# Altium PCB new示波器pcb.PcbDoc
Units mil, origin at the board's own origin, x right, y up, seen from the top; angles counter-clockwise.
Board outline 6795 x 3885 mil, 2 copper layers (Top Layer, Bottom Layer); 168 components, 155 nets, 695 pads, 49 vias.
Unrouted connection lines stored in the file: 188.
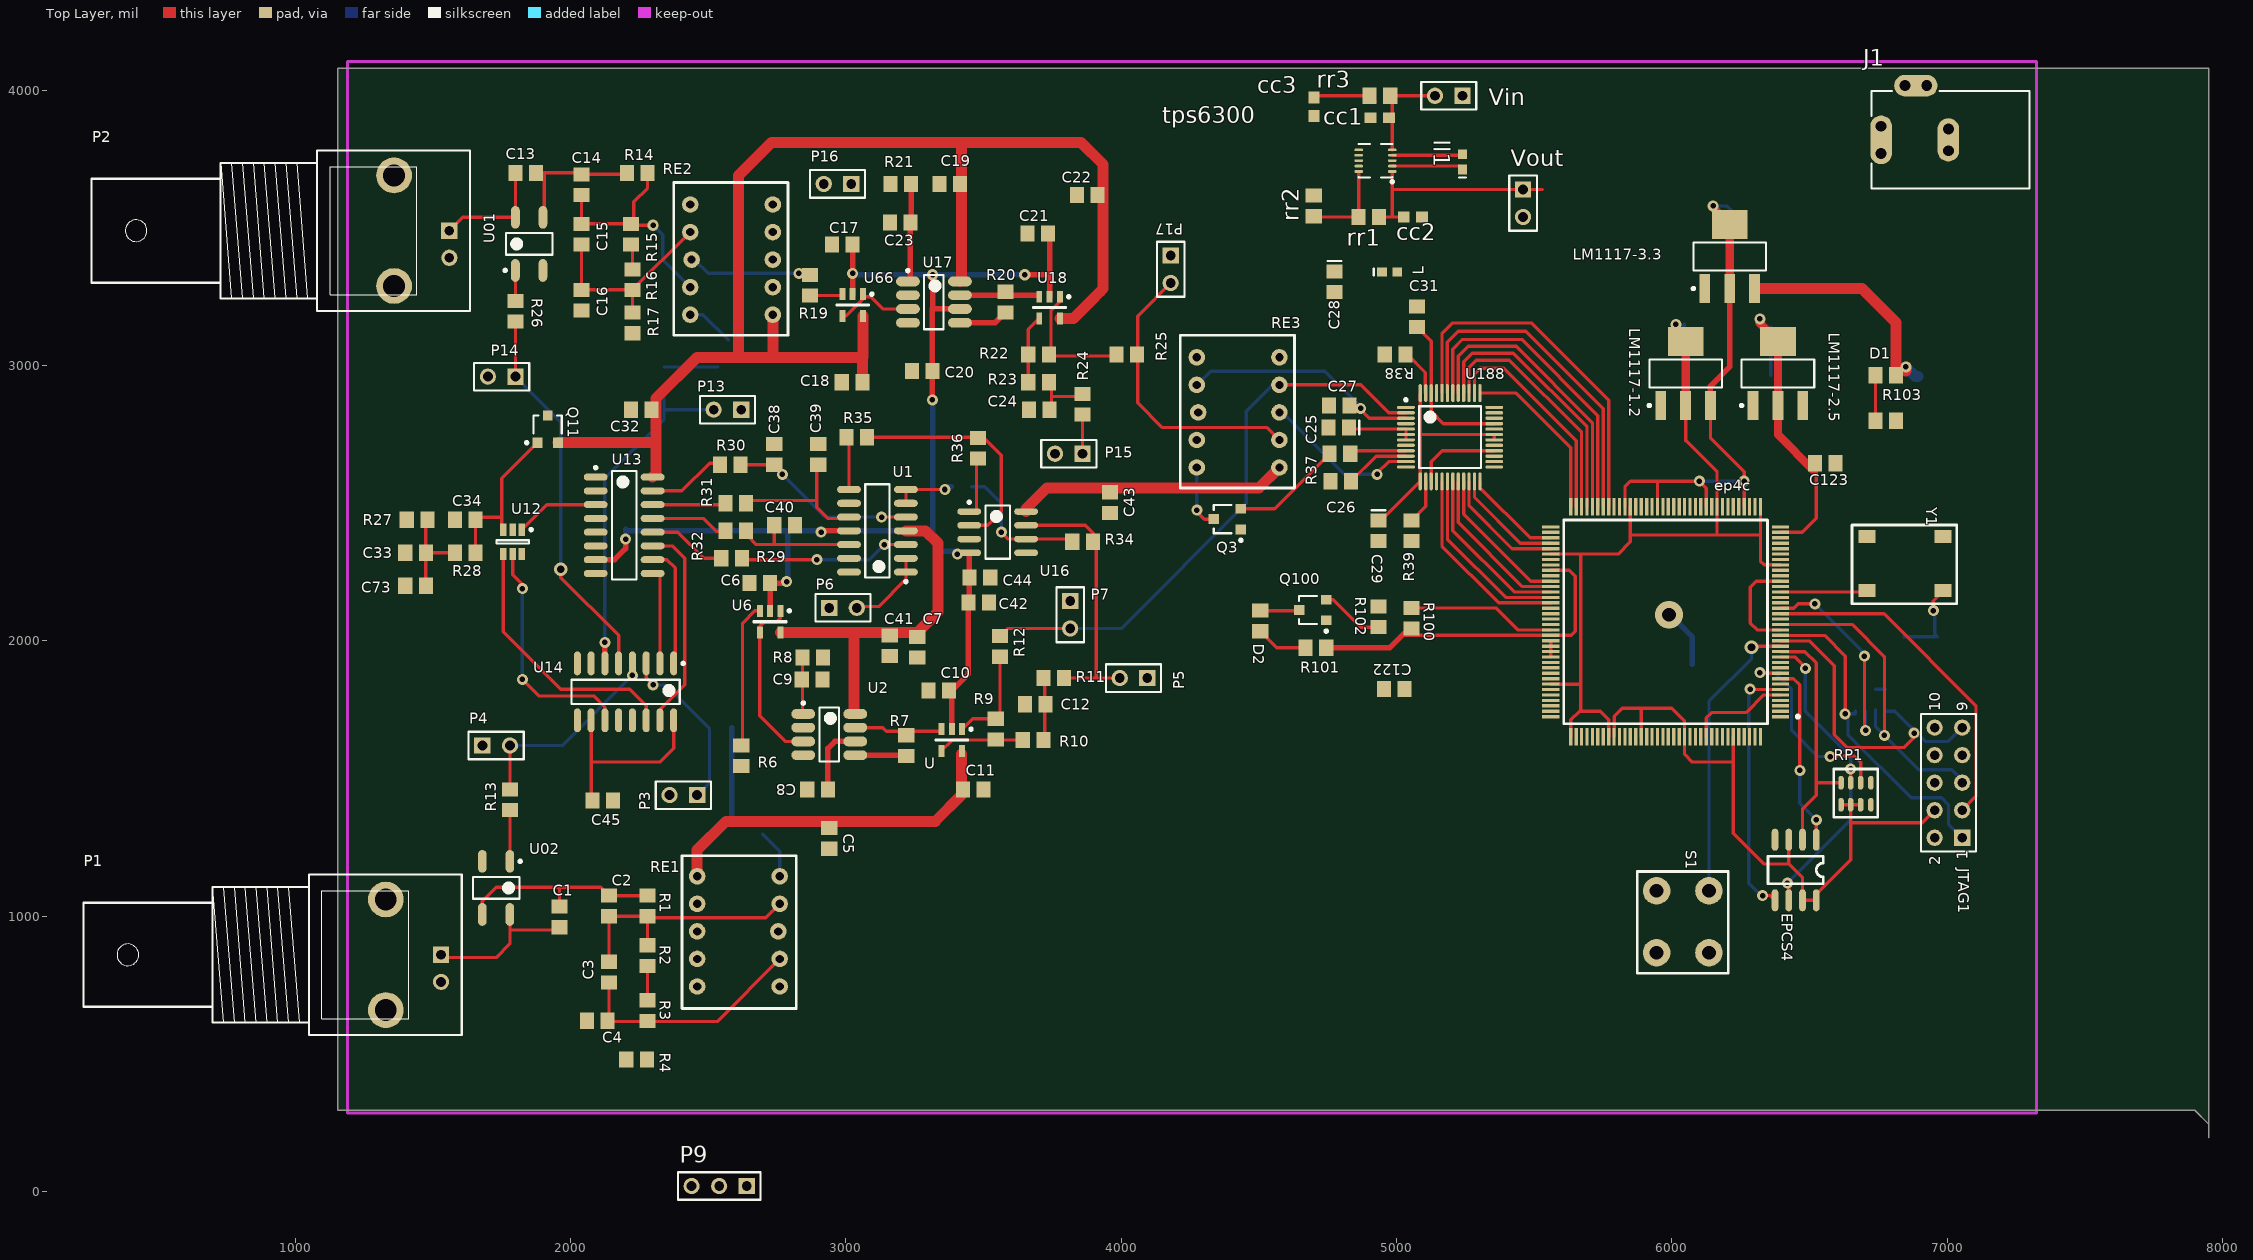
[diagram p0: Top Layer view]
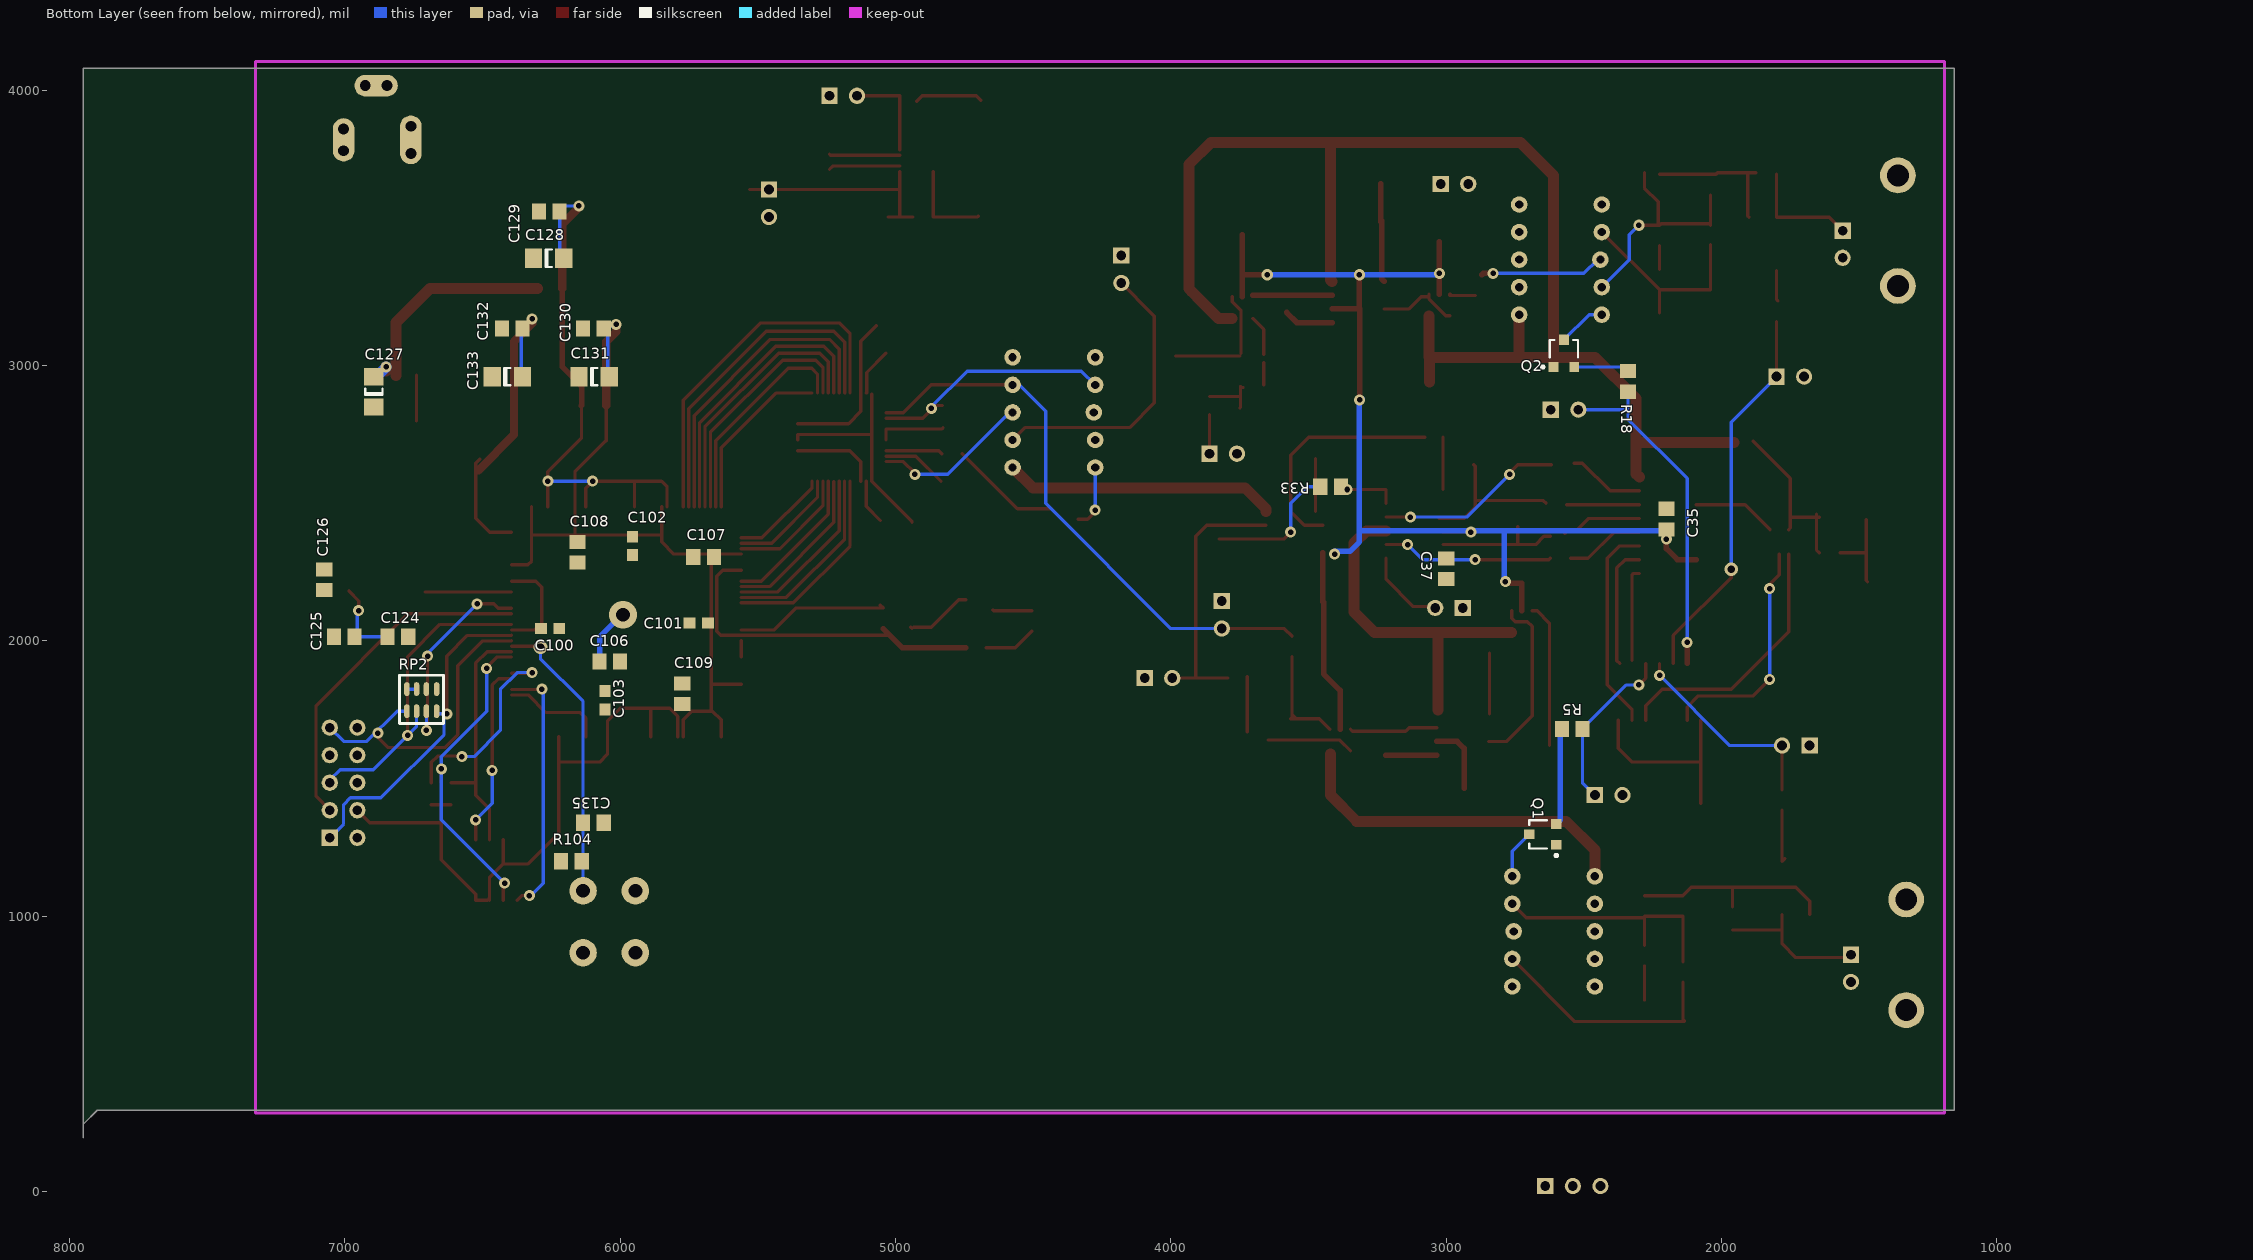
[diagram p1: Bottom Layer view, seen from below]

## Layer stack, top to bottom
Top Layer: signal copper 1.4
Dielectric: dielectric 12.6, FR-4, Dk 4.8
Bottom Layer: signal copper 1.4

## Board outline
1155,4080 7950,4080 7950,195 7950,245 7900,295 2380,295 1155,295 1155,4080

## Design rules (kind name [scope] priority, off if disabled: settings)
Clearance [All] p1: gap=1
HoleToHoleClearance [All] p1: gap=1 allowstackedmicrovias=TRUE
MinimumSolderMaskSliver [All] p1: minsoldermaskwidth=1
PolygonConnect [All] p1: connectstyle=Relief reliefconductorwidth=10 reliefentries=4 polygonreliefangle="90 Angle"
RoutingVias [All] p1: holewidth=28 width=50 viastyle="Through Hole" minholewidth=20 minwidth=40 maxholewidth=28 maxwidth=50
SilkToSilkClearance [All] p1: silktosilkclearance=1
SilkscreenOverComponentPads [All] p1: minsilkscreentomaskgap=1
SolderMaskExpansion [All] p1: expansion=4
TestPointUsage [All] p1: valid=0 allowmultiple=FALSE
Testpoint [All] p1: side=15 testpointundercomponent=TRUE minsize=40 maxsize=100 preferedsize=60 minholesize=0 maxholesize=40 preferedholesize=32 testpointgrid=1 style=1021 order=0123456789
Width [All] p1: maxlimit=100 minlimit=10 preferedwidth=10
20 further rules are at their usual default settings.

## Classes and differential pairs
component class 示波器原理图2: C13 C14 C15 C16 C17 C18 C19 C20 C21 C22 C23 C24 P2 P13 P14 P15 P16 P17 Q2 R14 R15 R16 R17 R18 R19 R20 R21 R22 R23 R24 R25 R26 RE2 U01 U17 U18 U66
component class 示波器原理图: C1 C2 C3 C4 C5 C6 C7 C8 C9 C10 C11 C12 P1 P3 P4 P5 P6 P7 P9 Q1 R1 R2 R3 R4 R5 R6 R7 R8 R9 R10 R11 R12 R13 RE1 RE4 U U02 U2 U6 U9 U20 U21
component class 示波器原理图3: C32 C33 C34 C35 C36 C37 C38 C39 C40 C41 C42 C43 C44 C45 C73 Q11 R27 R28 R29 R30 R31 R32 R33 R34 R35 R36 U1 U12 U13 U14 U16 U?
component class 示波器原理图5: C25 C26 C27 C28 C29 C30 C31 L Q3 R37 R38 R39 RE3 u1 U188
component class 示波器原理图7: C124 C125 C126 C127 C128 C129 C130 C131 C132 C133 C135 D1 D2 ep4c EPCS4 J1 JTAG1 LM1117-1.2 LM1117-2.5 LM1117-3.3 Q100 R100 R101 R102 R103 R104 RP1 RP2 S1 Y1
component class 示波器原理图6: C100 C101 C102 C103 C106 C107 C108 C109 C120 C121 C122 C123
component class TPS63000: cc1 cc2 cc3 ll1 rr1 rr2 rr3 tps6300 Vin Vout

## Components (designator, comment, footprint, x,y, rotation, side; value= is the part's Value field where it differs from the comment)
C1 "" PCBComponent_1#1 1960,960 r90 top
C2 "" PCBComponent_1#1 2140,1000 r90 top
C3 "" PCBComponent_1#1 2140,760 r90 top
C4 "" PCBComponent_1#1 2060,620 r0 top
C5 "" PCBComponent_1#1 2940,1320 r270 top
C6 "104" PCBComponent_1#1 2725,2210 r180 top
C7 "" PCBComponent_1#1 3260,1940 r90 top
C8 "" PCBComponent_1#1 2860,1460 r0 top
C9 "" PCBComponent_1#1 2840,1860 r0 top
C10 "" PCBComponent_1#1 3300,1820 r0 top
C11 "" PCBComponent_1#1 3500,1460 r180 top
C12 "" PCBComponent_1#1 3725,1770 r180 top
C13 "" PCBComponent_1#1 1800,3700 r0 top
C14 "" PCBComponent_1#1 2040,3620 r90 top
C15 "" PCBComponent_1#1 2040,3440 r90 top
C16 "" PCBComponent_1#1 2040,3200 r90 top
C17 "104" PCBComponent_1#1 3025,3440 r180 top
C18 "" PCBComponent_1#1 3060,2940 r180 top
C19 "" PCBComponent_1#1 3340,3660 r0 top
C20 "" PCBComponent_1#1 3240,2980 r0 top
C21 "" PCBComponent_1#1 3660,3480 r0 top
C22 "" PCBComponent_1#1 3840,3620 r0 top
C23 "" PCBComponent_1#1 3235,3520 r180 top
C24 "" PCBComponent_1#1 3740,2840 r180 top
C25 "" C0805 4790,2775 r180 top
C26 "" PCBComponent_1#1 4835,2580 r180 top
C27 "" PCBComponent_1#1 4830,2855 r180 top
C28 "" C0805 4775,3305 r270 top
C29 "" C0805 4935,2400 r270 top
C31 "" PCBComponent_1#1 5075,3140 r90 top
C32 "" PCBComponent_1#1 2220,2840 r0 top
C33 "" PCBComponent_1#1 1400,2320 r0 top
C34 "" PCBComponent_1#1 1580,2440 r0 top
C35 "" PCBComponent_1#1 2200,2480 r270 bottom
C37 "" PCBComponent_1#1 3000,2300 r270 bottom
C38 "" PCBComponent_1#1 2740,2640 r90 top
C39 "" PCBComponent_1#1 2900,2640 r90 top
C40 "" PCBComponent_1#1 2740,2420 r0 top
C41 "" PCBComponent_1#1 3160,2020 r270 top
C42 "" PCBComponent_1#1 3520,2140 r180 top
C43 "" PCBComponent_1#1 3960,2540 r270 top
C44 "" PCBComponent_1#1 3450,2230 r0 top
C45 "" PCBComponent_1#1 2080,1420 r0 top
C73 "" PCBComponent_1#1 1400,2200 r0 top
C100 "" PCBComponent_1#2 6215,2045 r0 bottom
C101 "" PCBComponent_1#2 5755,2065 r180 bottom
C102 "" PCBComponent_1#2 5955,2305 r90 bottom
C103 "" PCBComponent_1#2 6055,1825 r270 bottom
C106 "" PCBComponent_1#1 6075,1925 r180 bottom
C107 "" PCBComponent_1#1 5735,2305 r180 bottom
C108 "" PCBComponent_1#1 6155,2285 r90 bottom
C109 "" PCBComponent_1#1 5775,1845 r270 bottom
C122 "" PCBComponent_1#1 4955,1825 r0 top
C123 "" PCBComponent_1#1 6595,2645 r180 top
C124 "" PCBComponent_1#1 6845,2015 r180 bottom
C125 "" PCBComponent_1#1 6965,2015 r0 bottom
C126 "" PCBComponent_1#1 7075,2185 r90 bottom
C127 "" C1206 6895,2905 r90 bottom
C128 "" C1206 6260,3390 r180 bottom
C129 "0.1u" PCBComponent_1#1 6220,3560 r0 bottom
C130 "0.1u" PCBComponent_1#1 6060,3135 r0 bottom
C131 "" C1206 6095,2960 r180 bottom
C132 "0.1u" PCBComponent_1#1 6355,3135 r0 bottom
C133 "" C1206 6410,2960 r180 bottom
C135 "" PCBComponent_1#1 6060,1340 r0 bottom
cc1 "" 1608[0603] 4940,3900 r180 top
cc2 "" 1608[0603] 5060,3540 r0 top
cc3 "" 1608[0603] 4700,3940 r270 top
D1 "LED0" PCBComponent_1#1 6815,2965 r180 top
D2 "LED0" PCBComponent_1#1 4505,2035 r90 top
ep4c "Component_1" PCBComponent_1#3 6395,1725 r180 top
EPCS4 "" PCBComponent_1#4 6515,1165 r270 top
J1 "PWR" KLD-0202 7300,3820 r180 top
JTAG1 "" HDR2X5 7055,1285 r90 top
L "" L0603 4975,3340 r0 top
ll1 "" L0603 5240,3740 r90 top
LM1117-1.2 "" PCBComponent_1#5 5960,2855 r90 top
LM1117-2.5 "" PCBComponent_1#5 6295,2855 r90 top
LM1117-3.3 "" PCBComponent_1#5 6120,3280 r90 top
P1 "BNC" "BNC_RA CON" 1530,860 r0 top
P2 "BNC" "BNC_RA CON" 1560,3490 r0 top
P3 "Header 2" HDR1X2 2460,1440 r180 top
P4 "Header 2" HDR1X2 1680,1620 r0 top
P5 "Header 2" HDR1X2 4095,1865 r180 top
P6 "Header 2" HDR1X2 2940,2120 r0 top
P7 "Header 2" HDR1X2 3815,2145 r270 top
P9 "Header 3" HDR1X3 2640,20 r180 top
P13 "Header 2" HDR1X2 2620,2840 r180 top
P14 "Header 2" HDR1X2 1800,2960 r180 top
P15 "Header 2" HDR1X2 3860,2680 r180 top
P16 "Header 2" HDR1X2 3020,3660 r180 top
P17 "Header 2" HDR1X2 4180,3400 r270 top
Q1 "8050" PCBComponent_1#6 2600,1260 r90 bottom
Q2 "8050" PCBComponent_1#6 2610,2995 r180 bottom
Q3 "80501" PCBComponent_1#6 4435,2405 r90 top
Q11 "80501" PCBComponent_1#6 1880,2720 r0 top
Q100 "9013" PCBComponent_1#6 4745,2075 r90 top
R1 "" PCBComponent_1#1 2280,1000 r90 top
R2 "" PCBComponent_1#1 2280,820 r90 top
R3 "" PCBComponent_1#1 2280,620 r90 top
R4 "" 2012[0805] 2240,480 r0 top
R5 "" PCBComponent_1#1 2580,1680 r180 bottom
R6 "" PCBComponent_1#1 2620,1620 r270 top
R7 "" 2012[0805] 3220,1620 r270 top
R8 "" 2012[0805] 2880,1940 r180 top
R9 "" 2012[0805] 3545,1680 r270 top
R10 "" 2012[0805] 3680,1640 r180 top
R11 "" 2012[0805] 3755,1865 r180 top
R12 "" 2012[0805] 3560,1980 r270 top
R13 "" PCBComponent_1#1 1780,1460 r270 top
R14 "" PCBComponent_1#1 2280,3700 r180 top
R15 "" PCBComponent_1#1 2220,3440 r90 top
R16 "" PCBComponent_1#1 2225,3275 r90 top
R17 "" 2012[0805] 2225,3155 r90 top
R18 "" PCBComponent_1#1 2340,2980 r270 bottom
R19 "" PCBComponent_1#1 2870,3255 r90 top
R20 "" 2012[0805] 3580,3230.74 r270 top
R21 "" 2012[0805] 3200,3660 r0 top
R22 "" 2012[0805] 3700,3040 r180 top
R23 "" 2012[0805] 3700,2940 r180 top
R24 "" 2012[0805] 3860,2860 r90 top
R25 "" 2012[0805] 4020,3040 r180 top
R26 "" PCBComponent_1#1 1800,3160 r90 top
R27 "" PCBComponent_1#1 1480,2440 r180 top
R28 "" PCBComponent_1#1 1580,2320 r0 top
R29 "51" 2012[0805] 2585,2300 r0 top
R30 "51" 2012[0805] 2580,2640 r0 top
R31 "51" 2012[0805] 2600,2500 r0 top
R32 "51" 2012[0805] 2600,2400 r0 top
R33 "" 2012[0805] 3420,2560 r0 bottom
R34 "" 2012[0805] 3860,2360 r0 top
R35 "" 2012[0805] 3040,2740 r0 top
R36 "" 2012[0805] 3480,2700 r270 top
R37 "1K" 2012[0805] 4795,2680 r180 top
R38 "51" 2012[0805] 4995,3040 r180 top
R39 "51" 2012[0805] 5055,2400 r270 top
R100 "Res2" PCBComponent_1#1 5055,2045 r90 top
R101 "Res2" PCBComponent_1#1 4745,1975 r180 top
R102 "Res2" PCBComponent_1#1 4935,2125 r270 top
R103 "Res2" PCBComponent_1#1 6740,2800 r0 top
R104 "Res2" PCBComponent_1#1 6140,1200 r0 bottom
RE1 "TQ2-5V" PCBComponent_1#7 2460,1370 r270 top
RE2 "TQ2-5V" PCBComponent_1#7 2735,2960 r90 top
RE3 "" PCBComponent_1#7 4575,2405 r90 top
RP1 "Res Pack" PCBComponent_1#8 6615,1405 r90 top
RP2 "Res Pack" PCBComponent_1#8 6775,1745 r90 bottom
rr1 "" 6-0805 4900,3540 r180 top
rr2 "" 6-0805 4700,3580 r90 top
rr3 "" 6-0805 4940,3980 r0 top
S1 "SW-SPST" PCBComponent_1#9 6040,980 r0 top
tps6300 "" QFN50P300X300X100-10M 4985,3705 r90 top
U "AD8055ART" SOT95P245X110-5N 3385,1640 r270 top
U01 "" SOP254P610X218-4N 1950,3635 r90 top
U1 "TL074D" SOP127P600X175-14N 3115,2400 r180 top
U02 "" SOP254P610X218-4N 1630,910 r270 top
U2 "AD603AR" SOIC127P600X175-8N 2940,1660 r0 top
U6 "AD8055ART3" SOT95P245X110-5N 2725,2070 r270 top
U12 "AD5320" SOT86P280X110-6N 1790,2360 r270 top
U13 "74HC4051" SOP127P600X175-16N 2195,2420 r0 top
U14 "SN74HC595D" SOP127P600X175-16N 2200,1815 r270 top
U16 "TL072D" SOP127P600X175-8N 3655,2320 r0 top
U17 "AD603AR" SOIC127P600X175-8N 3320,3230.74 r0 top
U18 "AD8055ART" SOT95P245X110-5N 3740,3210.74 r270 top
U66 "AD8055ART3" SOT95P245X110-5N 3025,3220 r270 top
U188 "" TSQFP50P900X900X160-48N 5195,2740 r0 top
Vin "" HDR1X2 5240,3980 r180 top
Vout "Header 2" HDR1X2 5460,3640 r270 top
Y1 "Active crystal" PCBComponent_1#10 6855,2285 r90 top

## Footprints (in the part's own frame and the unit in brackets; to place one, negate y for a bottom-side part, rotate by r counter-clockwise, add the part's x,y. Pads: shape width x height; smd on the part's side, far side on the other; paste and mask are expansions set on the pad)
6-0805 [mm] "Chip Resistor; Body 2.0 x 1.3 mm (LxW typ)"
  rect 1.3x1.5 smd: 1(-0.95,0) 2(0.95,0)
1608[0603] [mm] "Chip Capacitor; Body 1.6 x 0.8 mm (LxW typ)"
  rect 1.1x1 smd: 1(-0.85,0) 2(0.85,0)
2012[0805] [mm] "Chip Resistor; Body 2.0 x 1.3 mm (LxW typ)"
  rect 1.3x1.5 smd: 1(-0.95,0) 2(0.95,0)
"BNC_RA CON" [mm] "Connector; BNC Elbow"
  rect 1.5x1.5 hole 0.9: 1(0,0)
  round 3.3 hole 2: 2(-5.1,-5.1) 2(-5.1,5.1)
  round 1.5 hole 0.9: 2(0,-2.5)
  silkscreen extent -33,-7.4 1.9,7.4
C0805 [mm] "Chip Capacitor; Body 2.0 x 1.2 mm (LxW typ)"
  rect 1.3x1.5 smd: 1(-0.95,0) 2(0.95,0)
  silkscreen extent -1.9,-0.65 -1.9,0.65
C1206 [mm] "Chip Capacitor; Body 3.2 x 1.6 mm (LxW typ)"
  rect 1.6x1.8 smd: 1(-1.4,0) 2(1.4,0)
  silkscreen extent -0.3,-0.8 0.3,0.8
HDR1X2 [mm] "Connector; Header; 2 Position"
  rect 1.5x1.5 hole 0.9: 1(0,0)
  round 1.5 hole 0.9: 2(2.54,0)
  silkscreen extent -1.27,-1.27 3.81,1.27
HDR1X3 [mm] "Connector; Header; 3 Position"
  rect 1.5x1.5 hole 0.9: 1(0,0)
  round 1.5 hole 0.9: 2(2.54,0) 3(5.08,0)
  silkscreen extent -1.27,-1.27 6.35,1.27
HDR2X5 [mm] "Connector; Header; 5x2 Position"
  rect 1.5x1.5 hole 0.9: 1(0,0)
  round 1.5 hole 0.9: 2(0,2.54) 3(2.54,0) 4(2.54,2.54) 5(5.08,0) 6(5.08,2.54) 7(7.62,0) 8(7.62,2.54) 9(10.16,0) 10(10.16,2.54)
  silkscreen extent -1.27,-1.27 11.43,3.81
KLD-0202 [mm] "DC Power Jack, 2.5mm, KLD Series, PCB Mount"
  oval 2x4.5 all layers, no hole: 1(13.7,0)
  round 1.5 hole 1: 1A(13.7,-1.25) 1B(13.7,1.25) 2A(7.5,-1) 2B(7.5,1) 3A(9.5,-5) 3B(11.5,-5)
  oval 2x4 all layers, no hole: 2(7.5,0)
  oval 4x2 all layers, no hole: 3(10.5,-5)
  silkscreen extent 0,-4.5 14.6,4.5
L0603 [mm] "Chip Inductor; Body 1.6 x 0.8 mm (LxW typ)"
  rect 0.9x0.8 smd: 1(-0.7,0) 2(0.7,0)
  silkscreen extent -1.45,-0.3 -1.45,0.3
PCBComponent_1#1 [mm]
  rect 1.3x1.5 smd: 1(0,0) 2(1.9,0)
PCBComponent_1#2 [mm]
  rect 1.1x1 smd: 1(0.166,0) 2(1.866,0)
PCBComponent_1#3 [mm]
  rect 1.6x0.3 smd: 1(0,0) 2(0,-0.5) 3(0,-1) 4(0,-1.5) 5(0,-2) 6(0,-2.5) 7(0,-3) 8(0,-3.5) 9(0,-4) 10(0,-4.5) 11(0,-5) 12(0,-5.5) 13(0,-6) 14(0,-6.5) 15(0,-7) 16(0,-7.5) 17(0,-8) 18(0,-8.5) 19(0,-9) 20(0,-9.5) 21(0,-10) 22(0,-10.5) 23(0,-11) 24(0,-11.5) 25(0,-12) 26(0,-12.5) 27(0,-13) 28(0,-13.5) 29(0,-14) 30(0,-14.5) 31(0,-15) 32(0,-15.5) 33(0,-16) 34(0,-16.5) 35(0,-17) 36(0,-17.5) 73(21.2,-17.5) 74(21.2,-17) 75(21.2,-16.5) 76(21.2,-16) 77(21.2,-15.5) 78(21.2,-15) 79(21.2,-14.5) 80(21.2,-14) 81(21.2,-13.5) 82(21.2,-13) 83(21.2,-12.5) 84(21.2,-12) 85(21.2,-11.5) 86(21.2,-11) 87(21.2,-10.5) 88(21.2,-10) 89(21.2,-9.5) 90(21.2,-9) 91(21.2,-8.5) 92(21.2,-8) 93(21.2,-7.5) 94(21.2,-7) 95(21.2,-6.5) 96(21.2,-6) 97(21.2,-5.5) 98(21.2,-5) 99(21.2,-4.5) 100(21.2,-4) 101(21.2,-3.5) 102(21.2,-3) 103(21.2,-2.5) 104(21.2,-2) 105(21.2,-1.5) 106(21.2,-1) 107(21.2,-0.5) 108(21.2,0)
  rect 0.3x1.6 smd: 37(1.85,-19.35) 38(2.35,-19.35) 39(2.85,-19.35) 40(3.35,-19.35) 41(3.85,-19.35) 42(4.35,-19.35) 43(4.85,-19.35) 44(5.35,-19.35) 45(5.85,-19.35) 46(6.35,-19.35) 47(6.85,-19.35) 48(7.35,-19.35) 49(7.85,-19.35) 50(8.35,-19.35) 51(8.85,-19.35) 52(9.35,-19.35) 53(9.85,-19.35) 54(10.35,-19.35) 55(10.85,-19.35) 56(11.35,-19.35) 57(11.85,-19.35) 58(12.35,-19.35) 59(12.85,-19.35) 60(13.35,-19.35) 61(13.85,-19.35) 62(14.35,-19.35) 63(14.85,-19.35) 64(15.35,-19.35) 65(15.85,-19.35) 66(16.35,-19.35) 67(16.85,-19.35) 68(17.35,-19.35) 69(17.85,-19.35) 70(18.35,-19.35) 71(18.85,-19.35) 72(19.35,-19.35) 109(19.35,1.85) 110(18.85,1.85) 111(18.35,1.85) 112(17.85,1.85) 113(17.35,1.85) 114(16.85,1.85) 115(16.35,1.85) 116(15.85,1.85) 117(15.35,1.85) 118(14.85,1.85) 119(14.35,1.85) 120(13.85,1.85) 121(13.35,1.85) 122(12.85,1.85) 123(12.35,1.85) 124(11.85,1.85) 125(11.35,1.85) 126(10.85,1.85) 127(10.35,1.85) 128(9.85,1.85) 129(9.35,1.85) 130(8.85,1.85) 131(8.35,1.85) 132(7.85,1.85) 133(7.35,1.85) 134(6.85,1.85) 135(6.35,1.85) 136(5.85,1.85) 137(5.35,1.85) 138(4.85,1.85) 139(4.35,1.85) 140(3.85,1.85) 141(3.35,1.85) 142(2.85,1.85) 143(2.35,1.85) 144(1.85,1.85)
  silkscreen extent -1.75,-18.15 20,0.65
PCBComponent_1#4 [mm]
  oval 2.032x0.61 smd: 1(-2.87,0.254) 2(-2.87,-1.016) 3(-2.87,-2.286) 4(-2.87,-3.556) 5(2.718,-3.556) 6(2.718,-2.286) 7(2.718,-1.016) 8(2.718,0.254)
  silkscreen extent -1.35,-4.19 1.19,0.89
PCBComponent_1#5 [mm]
  rect 2.7x1 smd: 1(0,0) 2(0,-2.3) 3(0,-4.6)
  rect 2.7x3.3 smd: 4(5.9,-2.3)
  silkscreen extent -0.12,-5.65 4.25,1.17, body extent 1.1,-5.65 4.8,1.05, height 1.7
PCBComponent_1#6 [mm]
  rect 0.9x0.95 smd: 1(0,0) 2(1.9,0) 3(0.95,2.5)
  silkscreen extent -1.12,-0.12 2.25,2.5
PCBComponent_1#7 [mm]
  round 1.524 hole 0.762: 1(5.715,0) 2(8.255,0) 3(10.795,0) 4(13.335,0) 5(15.875,0) 6(15.875,7.62) 7(13.335,7.62) 8(10.795,7.493) 9(8.255,7.62) 10(5.715,7.62)
  silkscreen extent 3.81,-1.4 17.91,9.14
PCBComponent_1#8 [mm]
  oval 1.27x0.508 smd: 1(0,0) 2(0,-0.889) 3(0,-1.803) 4(0,-2.743) 5(2.032,-2.743) 6(2.032,-1.803) 7(2.032,-0.889) 8(2.032,0)
  silkscreen extent -1.14,-3.38 3.3,0.69
PCBComponent_1#9 [mm]
  round 2.54 hole 1.27: 1(-2.413,-2.857) 1(-2.413,2.857) 2(2.413,-2.857) 2(2.413,2.857)
  silkscreen extent -4.19,-4.76 4.19,4.64
PCBComponent_1#10 [mm]
  rect 1.2x1.6 smd: 1(2.413,-3.302) 2(2.413,3.698) 3(-2.587,3.698) 4(-2.587,-3.302)
  silkscreen extent -3.81,-4.57 3.45,5.08
QFN50P300X300X100-10M [mm] "QFN, 10-Leads, Body 3.1x3.1mm (max), Pitch 0.50mm, IPC Low Density"
  oval 0.25x0.8 smd: 1(0,0) 2(0.5,0) 3(1,0) 4(1.5,0) 5(2,0) 6(2,3.1) 7(1.5,3.1) 8(1,3.1) 9(0.5,3.1) 10(0,3.1)
  rect 0x0 smd: 11(1,1.55) 12(1,1.55) 13(1,1.55) 14(1,1.55) 15(1,1.55) 16(1,1.55) 17(1,1.55) 18(1,1.55)
  silkscreen extent -1.07,-0.13 2.55,3.1, body extent -0.55,0 2.55,3.1, height 1
SOIC127P600X175-8N [mm] "SOIC, 8-Leads, Body 5.0x4.0mm (max), Pitch 1.27mm, IPC Medium Density"
  oval 2.2x0.9 smd: 1(-2.4,1.905) 2(-2.4,0.635) 3(-2.4,-0.635) 4(-2.4,-1.905) 5(2.4,-1.905) 6(2.4,-0.635) 7(2.4,0.635) 8(2.4,1.905)
  silkscreen extent -2.52,-2.5 0.9,3.03, body extent -2,-2.5 2,2.5, height 1.75
SOP127P600X175-8N [mm] "SOP, 8-Leads, Body 4.9x3.9mm (max), Pitch 1.27mm, IPC Medium Density"
  oval 2.2x0.6 smd: 1(-5.25,3.81) 2(-5.25,2.54) 3(-5.25,1.27) 4(-5.25,0) 5(0,0) 6(0,1.27) 7(0,2.54) 8(0,3.81)
  silkscreen extent -5.37,-0.55 -1.5,4.78, body extent -4.58,-0.55 -0.68,4.36, height 1.75
SOP127P600X175-14N [mm] "SOP, 14-Leads, Body 8.6x7.1mm (max), Pitch 1.27mm, IPC Medium Density"
  oval 2.2x0.65 smd: 1(-2.625,3.81) 2(-2.625,2.54) 3(-2.625,1.27) 4(-2.625,0) 5(-2.625,-1.27) 6(-2.625,-2.54) 7(-2.625,-3.81) 8(2.625,-3.81) 9(2.625,-2.54) 10(2.625,-1.27) 11(2.625,0) 12(2.625,1.27) 13(2.625,2.54) 14(2.625,3.81)
  silkscreen extent -2.75,-4.3 1.12,4.81, body extent -3.55,-4.33 3.55,4.33, height 1.75
SOP127P600X175-16N [mm] "SOP, 16-Leads, Body 10.0x8.9mm (max), Pitch 1.27mm, IPC Medium Density"
  oval 2.2x0.65 smd: 1(-2.625,4.445) 2(-2.625,3.175) 3(-2.625,1.905) 4(-2.625,0.635) 5(-2.625,-0.635) 6(-2.625,-1.905) 7(-2.625,-3.175) 8(-2.625,-4.445) 9(2.625,-4.445) 10(2.625,-3.175) 11(2.625,-1.905) 12(2.625,-0.635) 13(2.625,0.635) 14(2.625,1.905) 15(2.625,3.175) 16(2.625,4.445)
  silkscreen extent -2.75,-5 1.12,5.44, body extent -4.44,-5 4.44,5, height 1.75
SOP254P610X218-4N [mm] "SOP, 4-Leads, Body 4.3x3.9mm (max), Pitch 2.54mm, IPC Medium Density"
  oval 2.1x0.8 smd: 1(-7.35,3.81) 2(-7.35,1.27) 3(-2.45,1.27) 4(-2.45,3.81)
  silkscreen extent -7.47,0.39 -3.9,4.88, body extent -6.85,0.4 -2.96,4.68, height 2.18
SOT86P280X110-6N [mm] "SOT23, 6-Leads, Body 3.0x2.8mm (max), Pitch 0.86mm, IPC Medium Density"
  rect 1.15x0.6 smd: 1(-1.125,0.86) 2(-1.125,0) 3(-1.125,-0.86) 4(1.125,-0.86) 5(1.125,0) 6(1.125,0.86)
  silkscreen extent -1.25,-1.5 0.15,1.84, body extent -0.9,-1.5 0.9,1.5, height 1.1
SOT95P245X110-5N [mm] "SOT23, 5-Leads, Body 3.0x2.6mm (max), Pitch 0.95mm, IPC Medium Density"
  rect 1.1x0.55 smd: 1(-1,0.95) 2(-1,0) 3(-1,-0.95) 4(1,-0.95) 5(1,0.95)
  silkscreen extent -1.12,-1.5 0.05,1.9, body extent -0.7,-1.5 0.7,1.5, height 1.1
TSQFP50P900X900X160-48N [mm] "TSQFP, 48-Leads, Body 9.0x9.0mm (max), Pitch 0.50mm, IPC Medium Density"
  oval 1.65x0.3 smd: 1(-4.075,2.75) 2(-4.075,2.25) 3(-4.075,1.75) 4(-4.075,1.25) 5(-4.075,0.75) 6(-4.075,0.25) 7(-4.075,-0.25) 8(-4.075,-0.75) 9(-4.075,-1.25) 10(-4.075,-1.75) 11(-4.075,-2.25) 12(-4.075,-2.75) 25(4.075,-2.75) 26(4.075,-2.25) 27(4.075,-1.75) 28(4.075,-1.25) 29(4.075,-0.75) 30(4.075,-0.25) 31(4.075,0.25) 32(4.075,0.75) 33(4.075,1.25) 34(4.075,1.75) 35(4.075,2.25) 36(4.075,2.75)
  oval 0.3x1.65 smd: 13(-2.75,-4.075) 14(-2.25,-4.075) 15(-1.75,-4.075) 16(-1.25,-4.075) 17(-0.75,-4.075) 18(-0.25,-4.075) 19(0.25,-4.075) 20(0.75,-4.075) 21(1.25,-4.075) 22(1.75,-4.075) 23(2.25,-4.075) 24(2.75,-4.075) 37(2.75,4.075) 38(2.25,4.075) 39(1.75,4.075) 40(1.25,4.075) 41(0.75,4.075) 42(0.25,4.075) 43(-0.25,4.075) 44(-0.75,4.075) 45(-1.25,4.075) 46(-1.75,4.075) 47(-2.25,4.075) 48(-2.75,4.075)
  silkscreen extent -4.2,-2.85 2.85,3.57, body extent -3.5,-3.5 3.5,3.5, height 1.6

## Part data
C1 C2 C3 C4 C5 C6 C7 C8 C9 C10 C11 C12 C13 C14 C15 C16 C17 C18 C19 C20 C21 C22 C23 C24 C26 C27 C31 C32 C33 C34 C35 C37 C38 C39 C40 C41 C42 C43 C44 C45 C73: library part Cap, "Capacitor"
C25 C28 C29: library part "Cap Pol3", "Polarized Capacitor (Surface Mount)"
C100 C101 C102 C103 C106 C107 C108 C109 C122 C123 C124 C125 C126 C127 C128 C131 C133 C135 cc1 cc2 cc3: library part "Cap Semi", "Capacitor (Semiconductor SIM Model)"
C129 C130 C132: library part CAP, "Capacitor"
D1 D2: "Typical INFRARED GaAs LED"
EPCS4 LM1117-1.2 LM1117-2.5 LM1117-3.3 RE1 RE2 RE3 tps6300 U01 U02 U12 U13 U188: library part Component_1
J1: library part PWR2.5, "Low Voltage Power Supply Connector"
JTAG1: library part "Header 5X2", "Header, 5-Pin, Dual row"
L ll1: library part Inductor, "Inductor"
P1 P2: "BNC Elbow Connector"
P3 P4 P5 P6 P7 P13 P14 P15 P16 P17 Vout: "Header, 2-Pin"
P9: "Header, 3-Pin"
Q1 Q2 Q3 Q11: library part 2N3906, "PNP General Purpose Amplifier"
Q100: library part 2N3904, "NPN General Purpose Amplifier"
R1 R2 R3 R5 R6 R13 R14 R15 R16 R18 R19 R26 R27 R28: library part Res1, "Resistor"
R4 R7 R8 R9 R10 R11 R12 R17 R20 R21 R22 R23 R24 R25 R29 R30 R31 R32 R33 R34 R35 R36 R37 R38 R39: library part "Res Semi", "Semiconductor Resistor"
R100 R101 R102 R103 R104: "Resistor"
RP1 RP2: library part "Res Pack3", "Isolated Resistor Network"
rr1 rr2 rr3: library part "Res Thermal", "Thermistor"
S1: library part SW-SPST_1, "Single-Pole, Single-Throw Switch"
U U18: "Low Cost, 300MHz Voltage Feedback Amplifier"
U1 U16: "Low-Noise JFET-Input Operational Amplifier"
U2 U17: "Low-Noise, 90MHz Variable Gain Amplifier"
U6 U66: library part AD8055ART, "Low Cost, 300MHz Voltage Feedback Amplifier"
U14: "8-Bit Shift Register with 3-State Output Registers"
Vin: library part "Header 2", "Header, 2-Pin"

## Via types
v1: diameter 40, hole 20, Top Layer to Bottom Layer, 46 vias
v2: diameter 50, hole 28, Top Layer to Bottom Layer, 2 vias
v3: diameter 100, hole 50, Top Layer to Bottom Layer, 1 vias

## Nets (pads, with @x,y where several pads share a name; then routed paths per layer and width w, separated by ;. In a path a pad name is that pad's centre, name@x,y a point inside that pad or via, vN(x,y) a via of type N, cw(c..) or ccw(c..) an arc to the next point about the centre after c; other vN are vias at no path point)
1: ep4c.1
2: ep4c.2
3: ep4c.3
3.3V: C45.1 U14.10 U14.16 | length 732.5
  Top Layer w12: C45.1@2075,1410 U14.10 U14.10@2075,1703.15 ; 2075,1560 2325,1560 2375,1610 U14.16
7: ep4c.7
10: ep4c.10
11: ep4c.11
28: ep4c.28
30: ep4c.30
31: ep4c.31
32: ep4c.32
33: ep4c.33
34: ep4c.34
52: ep4c.52
53: ep4c.53
54: ep4c.54
55: ep4c.55
58: ep4c.58
59: ep4c.59
60: ep4c.60
98: ep4c.98
99: ep4c.99
100: ep4c.100
101: ep4c.101
103: ep4c.103
104: ep4c.104
105: ep4c.105
106: ep4c.106
+3.3: C31.1 C100.2 C101.2 C102.2 C103.2 C124.1 C125.1 C126.1 C128.2 C129.1 ep4c.17 ep4c.26 ep4c.40 ep4c.47 ep4c.56 ep4c.62 ep4c.81 ep4c.93 ep4c.117 ep4c.122 ep4c.130 ep4c.139 EPCS4.3 EPCS4.7 EPCS4.8 JTAG1.4 L.1 LM1117-1.2.3 LM1117-2.5.3 LM1117-3.3.2 LM1117-3.3.4 R100.1 R101.1 R104.2 RP1.1 RP1.2 RP1.3 RP2.7 RP2.8 U188.8 U188.15 U188.28 U188.33 U188.46 Y1.4 | length 7505.4
  Top Layer w12: R100.1@5026.26,2020.28 ep4c.93 5634.72,2020.28 5650,2035.55 5650,2235 5628.5,2256.5 ep4c.81 ; C31.1@5070,3145 5126.1,3088.9 U188.46 5126.1,2833.9 5170.79,2789.21 U188.33 ; U188.15 5126.1,2651.1 5165.79,2690.79 U188.28 ; ep4c.117 5790.67,1725.67 5820,1755 6000,1755 6046.58,1708.42 ep4c.130 6046.58,1588.42 6075,1560 6223.74,1560 ; ep4c.62 5830.04,2560.04 5850,2580 5948.15,2580 ; ep4c.122 5889.09,1755 ; ep4c.56 5948.15,2580 ; ep4c.47 6125.31,2554.68 v1(6100,2580) 5948.15,2580 ; LM1117-1.2.3 6141.1,2736.1 6263.11,2614.1 v1(6263.11,2580) ep4c.40 ; ep4c.139 6223.74,1301.26 6335,1190 6425,1190 ; ep4c.17 6310.04,2039.96 6285,2065 6285,2195 6307.13,2217.13 ep4c.26 ; EPCS4.3 6425,1190 ; EPCS4.7 EPCS4.7@6475,1065 ; RP1.1 RP1.2 ; 6650,1340 6910,1340 JTAG1.4 ; RP1.3 RP1.2 ; v1(6950,2110) 6950,2145 6985,2180 Y1.4 ; 6425,1190 6475,1140 EPCS4.7@6475,1065 ; EPCS4.7@6475,1065 6482,1058 EPCS4.8 6525,1080 6650,1205 RP1.2
  Top Layer w20: R101.1 4975,1975 R100.1@5045,2045 ; LM1117-1.2.3 6140,2856.1 6140,2925 6210.55,2995.55 LM1117-3.3.2
  Top Layer w30: v1(6150,3580) 6150,3575 6210.55,3514.45 LM1117-3.3.4 6210.55,3509.45 LM1117-3.3.2
  Bottom Layer w12: v1(6100,2580) v1(6263.11,2580) ; v1(6150,3580) 6200,3580 C129.1 C128.2@6220,3390 ; C128.2 C128.2@6220,3374.88 ; RP2.7 RP2.8 ; C124.1 C125.1@6955,2015 ; v1@6955,2120 6955,2025 C125.1
+5: C5.1 C7.2 C11.2 C18.1 C19.2 C22.2 C32.2 C41.1 C43.1 C127.2 D1.1 J1.1 J1.1A J1.1B LM1117-3.3.3 P9.1 Q11.2 RE1.1 RE2.1 RE3.1 U1.4 U2.8 U6.5 U13.16 U16.8 U17.8 U18.5 U66.5 U.5 | length 9577.7
  Top Layer w40: Q11.2 2299.8,2720 2309.8,2730 ; U13.16 2309.8,2606.46 2309.8,2730 ; RE1.1 2460,1240 2565,1345 3325,1345 3420,1440 U.5@3420,1590 ; 2610,3035 2610,3690 2730,3810 3420,3810 ; 2735,3035 RE2.1 ; U6.5 3189.37,2030.63 3260.63,2030.63 3335,2105 3335,2355 3290,2400 U1.4 ; U2.8@3029.49,1750 3029.49,2030.63 ; C18.1 3060,3029.67 ; 3062.4,3157.4 U66.5 3062.4,3032.07 3059.5,3030.87 3057.4,3030 2460,3030 2309.8,2879.8 2309.8,2730 ; 3385,3810 3420,3810 ; U17.8 3420,3311.25 3420,3810 ; U16.8 3655,2480 3730,2555 4500,2555 RE3.1 ; U18.5 3826.37,3171.37 3925,3270 ; 3879.07,3224.07 3935,3280 3935,3730 3855,3810 3420,3810 ; LM1117-3.3.3 6691.42,3280 6815,3156.42 D1.1 ; v1@6850,2980 v1(6850,2995)
  Bottom Layer w40: v1(6850,2995) 6885,2960 6895,2960 C127.2
-5: C6.1 C8.2 C10.2 C17.1 C20.2 C21.2 C35.2 C42.2 C44.1 P9.3 U1.11 U2.6 U6.2 U13.7 U16.4 U17.6 U18.2 U66.2 U.2 | length 5011.3
  Top Layer w20: U13.7 2160,2295 2200,2335 v1(2200,2370) ; U6.2 C6.1 v1@2780,2210 ; v1@2915,2400 U1.11 ; C8.2@2935,1465 2935,1610 2960,1635 U2.6 ; U66.2 C17.1@3025,3450 ; v1(3314.8,2875.2) 3314.8,3205.74 ; v1(3315,3330) 3315,3210 3319.26,3205.74 U17.6 ; U.2 3385,1820 3445.2,1880.2 C42.2 3448.31,2143.11 3448.31,2230 U16.4 ; v1(3405,2315) U16.4@3410,2320 ; v1(3650,3330) 3735,3330 3740,3335 C21.2@3740,3475 ; U18.2 3740,3365
  Bottom Layer w20: v1(2200,2370) C35.2@2200,2400 ; C35.2 C35.2@2200,2400 ; 2785,2400 2790,2400 ; v1@2790,2220 2790,2400 ; v1(3025,3335) 3030,3330 v1(3650,3330) ; 3305,2400 2790,2400 ; v1@3305,2880 3315,2870 3315,2360 3350,2325 v1@3405,2325 ; C35.2@2200,2400 2790,2400
  other v1: 2785,2215 2910,2395
AD_CH1: P7.2 R12.1 RE3.4 U188.2 | length 2090.8
  Top Layer w12: R12.1 3587.6,2045 P7.2 ; RE3.4 4870,2930 4971.42,2828.58 U188.2
  Bottom Layer w12: P7.2 4000,2045 4455,2500 4455,2835 4550,2930 RE3.4
AD_CH2: P17.1 P17.2 R25.1 RE3.2 | length 1069.8
  Top Layer w12: P17.2@4190,3310 4060,3180 4060,2865 4150,2775 4530,2775 RE3.2
AD_CLKA: R38.2
AD_CLKB: R39.2
AD_DA0: ep4c.72 U188.37 | length 627.2
  Top Layer w12: U188.37 5434.57,2900.43 5633.19,2701.81 ep4c.72
AD_DA1: ep4c.71 U188.38 | length 795.5
  Top Layer w12: U188.38 5283.58,2968.58 5305,2990 5390,2990 5652.87,2727.13 ep4c.71
AD_DA2: ep4c.70 U188.39 | length 892.3
  Top Layer w12: U188.39 5263.9,2993.9 5290,3020 5410,3020 5672.56,2757.44 ep4c.70
AD_DA3: ep4c.69 U188.40 | length 976.2
  Top Layer w12: U188.40 5244.21,3014.21 5275,3045 5425,3045 5692.24,2777.76 ep4c.69
AD_DA4: ep4c.68 U188.41 | length 1057.2
  Top Layer w12: U188.41 5224.53,3034.53 5260,3070 5435,3070 5711.93,2793.07 ep4c.68
AD_DA5: ep4c.67 U188.42 | length 1146.9
  Top Layer w12: U188.42 5204.84,3059.84 5240,3095 5455,3095 5731.61,2818.39 ep4c.67
AD_DA6: ep4c.66 U188.43 | length 1240.9
  Top Layer w12: U188.43 5185,2900.59 5185,3085 5225,3125 5470,3125 5751.3,2843.7 ep4c.66
AD_DA7: ep4c.65 U188.44 | length 1340.5
  Top Layer w12: U188.44 5165.47,3115.47 5205,3155 5490,3155 5770.98,2874.02 ep4c.65
AD_DB0: ep4c.75 U188.24 | length 355.4
  Top Layer w12: U188.24 5303.27,2556.73 5485.39,2374.61 ep4c.75
AD_DB1: ep4c.76 U188.23 | length 403.9
  Top Layer w12: U188.23 5283.58,2521.42 5450.08,2354.92 ep4c.76
AD_DB2: ep4c.77 U188.22 | length 449.5
  Top Layer w12: U188.22 5263.9,2491.1 5419.76,2335.24 ep4c.77
AD_DB3: ep4c.83 U188.21 | length 535.8
  Top Layer w12: U188.21 5244.21,2460.79 5487.87,2217.13 ep4c.83
AD_DB4: ep4c.84 U188.20 | length 580.1
  Top Layer w12: U188.20@5224.53,2578.22 5224.53,2430.47 5457.56,2197.44 ep4c.84
AD_DB5: ep4c.85 U188.19 | length 627
  Top Layer w12: U188.19 5204.84,2400.16 5427.24,2177.76 ep4c.85
AD_DB6: ep4c.86 U188.18 | length 672.6
  Top Layer w12: U188.18 5185.16,2369.84 5396.93,2158.07 ep4c.86
AD_DB7: ep4c.87 U188.17 | length 715.3
  Top Layer w12: U188.17 5165.47,2344.53 5371.61,2138.39 ep4c.87
AD_S: R37.1 U14.7 U188.9 | length 206.6
  Top Layer w12: R37.1 4843.19,2690.79 U188.9
ASDO: ep4c.6 EPCS4.5 | length 934.1
  Top Layer w12: v1@6285,1823.43 ep4c.6 ; v1(6330,1075) 6358,1075 EPCS4.5
  Bottom Layer w12: v1@6280,1823.43 6280,1120 6325,1075 v1(6330,1075)
  other v1: 6285,1825
"CH1 ACDC": P4.2 R13.1 U14.4 | length 754
  Top Layer w12: R13.1 P4.2 ; v1(2225,1875) U14.4
  Bottom Layer w12: P4.2 1890,1620 1970,1620 v1(2225,1875)
"CH1 ATT": P3.1 R5.2 U14.3 | length 618.7
  Top Layer w12: U14.3 2275,1865 v1(2300,1840)
  Bottom Layer w12: v1(2300,1840) 2345.2,1840 2505,1680.2 2505,1485 P3.1
CH1_VAMP: P6.2 R8.1 U1.1 U1.2 | length 309
  Top Layer w12: P6.2@3035,2105 3055,2125 3120,2125 3218.35,2223.35 U1.1 U1.2
CH1_VPOS: P5.2 R11.1 R34.2 U16.7 | length 989.2
  Top Layer w12: U16.7 3870,2420 3910,2380 3910,1865 ; R11.1 3910,1865 ; P5.2 3910,1865
"CH2 ACDC": P14.1 P14.2 R26.1 U14.5 | length 1397
  Top Layer w12: P14.1 R26.1 ; v2(1965,2260) 1965,2230 2175,2020 U14.5
  Bottom Layer w12: P14.1 1965,2795 v2(1965,2260)
"CH2 ATT": P13.1 P13.2 R18.2 U14.6 | length 1317.8
  Top Layer w20: U14.6 v1(2125,1995)
  Bottom Layer w12: v1(2125,1995) 2125,2590 2340,2805 2340,2905 2340,2845 2345,2840 P13.2
CH2_VAMP: P16.1 P16.2 R21.1
CH2_VPOS: P15.1 P15.2 R24.1 | length 142.6
  Top Layer w12: P15.1 R24.1
CLK: ep4c.24 Y1.3 | length 314.4
  Top Layer w12: ep4c.24 Y1.3@6709.41,2177.76
DATA0: ep4c.13 EPCS4.2 RP1.8 | length 894.8
  Top Layer w12: ep4c.13 6468.78,1961.22 6483.78,1961.22 6525,1920 6525,1440 6475,1390 EPCS4.2 ; 6530,1485 RP1.8
DCLK: ep4c.12 EPCS4.6 RP1.7 | length 1170.7
  Top Layer w12: ep4c.12 6448.46,1941.54 6485,1905 v1(6485,1900) ; v1(6420,1120) 6425,1120 EPCS4.6 ; RP1.7 v1(6650,1535)
  Bottom Layer w12: v1(6420,1120) 6650,1350 v1(6650,1535) 6650,1580 6485,1745 v1(6485,1900)
GND: C4.1 C5.2 C6.2 C7.1 C8.1 C9.2 C10.1 C11.1 C12.2 C16.1 C17.2 C18.2 C19.1 C20.1 C21.1 C22.1 C23.2 C24.2 C25.2 C26.2 C27.2 C28.2 C29.2 C31.2 C32.1 C33.1 C34.1 C35.1 C37.2 C38.2 C39.2 C40.2 C41.2 C42.1 C43.2 C44.2 C45.2 C73.1 C100.1 C101.1 C102.1 C103.1 C106.1 C107.1 C108.1 C109.1 C122.1 C123.1 C124.2 C125.2 C126.2 C127.1 C128.1 C129.2 C130.2 C131.1 C132.2 C133.1 C135.1 cc1.2 cc2.2 cc3.2 ep4c.4 ep4c.19 ep4c.22 ep4c.27 ep4c.36 ep4c.41 ep4c.48 ep4c.57 ep4c.63 ep4c.79 ep4c.82 ep4c.94 ep4c.95 ep4c.96 ep4c.97 ep4c.108 ep4c.118 ep4c.123 ep4c.131 ep4c.140 EPCS4.4 J1.2 J1.2A J1.2B J1.3 J1.3A J1.3B JTAG1.2 JTAG1.10 LM1117-1.2.1 LM1117-2.5.1 LM1117-3.3.1 P1.2 P2.2 P3.2 P4.1 P5.1 P6.1 P7.1 P9.2 Q1.1 Q2.1 Q3.1 Q11.3 Q100.1 R4.1 R17.1 R27.2 R103.2 RP2.5 RP2.6 rr2.2 S1.1 tps6300.3 tps6300.9 U01.2 U02.2 U2.4 U12.2 U13.6 U13.8 U14.8 U14.13 U16.3 U16.5 U17.4 U188.1 U188.4 U188.12 U188.16 U188.27 U188.29 U188.32 U188.34 U188.45 Vin.1 Vout.2 Y1.2 | length 277.2
  Top Layer w12: ep4c.97 ep4c.96 ep4c.95 ep4c.94
  Bottom Layer w20: v3(5990,2095) 5995,2095 6075,2015 C106.1@6075,1915
NCE: ep4c.21 RP2.3 | length 748.4
  Top Layer w12: ep4c.21 6443.7,2118.7 6460,2135 v1(6520,2135) ; v1(6700,1945) 6700,1670 v1@6705,1665
  Bottom Layer w12: v1(6520,2135) 6700,1955 v1(6700,1945) ; v1(6704,1675) RP2.3
NCSO: ep4c.8 EPCS4.1 | length 666.3
  Top Layer w12: ep4c.8 6442.2,1862.8 6465,1840 v1(6465,1530) ; EPCS4.1 v1(6525,1350)
  Bottom Layer w12: v1(6465,1530) 6465,1410 v1(6525,1350)
NetC1_1: C1.1 P1.1 U02.4 | length 563.6
  Top Layer w12: P1.1@1545,850 1730,850 1780,900 U02.4 U02.4@1780,985 ; 1780,950 C1.1@1960,950
NetC1_2: C1.2 C2.2 R1.2 U02.3 | length 752
  Top Layer w12: U02.3 1680,1055 1730,1105 1960,1105 ; C1.2 1960,1105 ; R1.2 C2.2 2109.8,1105 1960,1105
NetC2_1: C2.1 C3.2 R1.1 R2.2 RE1.9 | length 911.1
  Top Layer w12: C3.2 C2.1 R1.1 R1.1@2280,995 ; R2.2 R1.1@2280,995 ; RE1.9 2710,995 R1.1@2280,995
NetC3_1: C3.1 C4.2 R3.1 R4.2 RE1.7 | length 861.5
  Top Layer w12: C4.2@2134.8,617.6 2532.6,617.6 RE1.7 ; C4.2 2140,625.2 C3.1
NetC9_1: C9.1 R8.2 U2.1 | length 220
  Top Layer w12: U2.1@2842.6,1735 R8.2@2842.6,1955
NetC12_1: C12.1 R10.1 R11.2 | length 200
  Top Layer w12: 3722.4,1670 R11.2@3722.4,1870
NetC13_1: C13.1 P2.1 U01.4 | length 416.6
  Top Layer w12: P2.1 1608.54,3538.54 U01.4 1800,3625 C13.1@1800,3695
NetC13_2: C13.2 C14.2 R14.2 U01.3 | length 510.8
  Top Layer w12: C13.2 2014.8,3700 2020,3694.8 R14.2@2225,3694.8 ; U01.3 1904.8,3543.35 1904.8,3695
NetC14_1: C14.1 C15.2 R14.1 R15.2 RE2.9 | length 872.7
  Top Layer w12: C15.2@2040,3510 C15.2 ; C14.1 C15.2 ; R14.1 2280,3645 2230,3595 2230,3514.8 R15.2@2225,3509.8 ; v1@2285,3505 v1@2280.2,3509.8 ; v1(2300.2,3509.8) v1@2280.2,3509.8 ; C15.2 R15.2 R15.2@2225,3509.8 ; R15.2@2225,3509.8 v1@2280.2,3509.8
  Bottom Layer w12: v1(2300.2,3509.8) 2335,3475 2335,3385 RE2.9
NetC15_1: C15.1 C16.2 R16.1 R17.2 RE2.7 | length 729.8
  Top Layer w12: C16.2 C15.1 ; C16.2@2040,3275 R16.1 ; R17.2 R16.1 ; RE2.7 R16.1
NetC23_1: C23.1 R21.2 U17.1 | length 361.3
  Top Layer w20: U17.1 3235,3315.23 C23.1@3235,3525.74 ; C23.1@3237.4,3522.6 R21.2
NetC24_1: C24.1 R23.1 R24.2 | length 203.7
  Top Layer w10: R23.1@3737.4,2920.74 R23.1@3747.4,2920.74 ; 3747.4,2887.6 R24.2@3860,2887.6 ; R23.1@3747.4,2925 R23.1@3747.4,2920.74 ; C24.1@3750,2845 3747.4,2847.6 R23.1@3747.4,2920.74
NetC25_1: C25.1 U188.5 U188.6 U188.7 | length 248.8
  Top Layer w12: C25.1 4832.87,2769.53 U188.5 U188.6 U188.7
NetC26_1: C26.1 RE3.8 U188.10 | length 237.3
  Top Layer w12: C26.1 4926.1,2671.1 U188.10
NetC27_1: C27.1 RE3.7 U188.3 | length 898.2
  Top Layer w12: C27.1 4855,2855 4901.1,2808.9 U188.3
  Bottom Layer w12: RE3.7 4325,2980 4740,2980 4870,2850 v1(4870,2845)
NetC28_1: C28.1 L.2
NetC29_1: C29.1 U188.13 U188.30 U188.31 U188.48 | length 814.6
  Top Layer w12: C29.1@4940,2430 4940,2432.83 U188.13 5086.73,2626.73 U188.48@5086.73,2895.43 ; 5086.73,2749.84 U188.31 U188.30
NetC34_2: C34.2 Q11.1 R28.2 U12.3 | length 628.4
  Top Layer w12: R28.2@1644.8,2320 1655,2330.2 C34.2@1655,2459.8 ; C34.2@1644.8,2449.4 1750,2449.4 ; U12.3 1750,2410.43 1750,2590 Q11.1@1885,2725
NetC37_1: C37.1 R29.2 U1.3 | length 620.8
  Top Layer w12: R29.2 2627.4,2295 v1(2895,2295) ; v1(3140,2350) U1.3
  Bottom Layer w12: v1(2895,2295) 3085,2295 v1(3140,2350)
NetC38_1: C38.1 R30.2 U1.5 | length 682.6
  Top Layer w12: R30.2 C38.1 2770,2610 v1(2770,2605) ; v1(3130,2450) U1.5
  Bottom Layer w12: v1(2770,2605) 2925,2450 v1(3130,2450)
NetC39_1: C39.1 R31.2 U1.10 | length 575.4
  Top Layer w12: R31.2 2647.4,2510 2895,2510 ; 2895,2540 2895,2530 ; C39.1 2895,2635 2895,2530 ; U1.10@3025,2445 2935,2445 2895,2485 2895,2530
NetC40_1: C40.1 R32.2 U1.12 | length 466.7
  Top Layer w12: R32.2@2622.4,2380 2645,2380 2675,2350 U1.12 ; 2740,2350 C40.1@2740,2415
Netcc1_1: cc1.1 rr3.2 tps6300.5 Vin.2 | length 345.4
  Top Layer w12: tps6300.5 4985,3980 5120,3980 Vin.2@5130,3970
Netcc2_1: cc2.1 rr1.1 tps6300.1 Vout.1 | length 801.2
  Top Layer w12: rr1.1 4980,3540 ; tps6300.1 4985,3640 ; cc2.1 4980,3540 ; 5530,3640 4985,3640 ; 4980,3540 4985,3545 4985,3640
Netcc3_1: cc3.1 rr3.1 | length 246.6
  Top Layer w12: cc3.1@4690.77,3964.23 4706.54,3980 rr3.1 rr3.1@4922.6,3960
NetD1_2: D1.2 R103.1 | length 165.1
  Top Layer w12: R103.1 6740.2,2800.2 D1.2
NetD2_1: D2.1 R101.2 | length 190
  Top Layer w12: D2.1 4565,1975 R101.2
NetD2_2: D2.2 Q100.3 | length 142.7
  Top Layer w12: D2.2 4643.98,2109.8 Q100.3
Netep4c_92: ep4c.92 R100.2 R102.1 | length 562.8
  Top Layer w12: R100.2@5055.16,2129.96 5045,2119.8 5360.2,2119.8 5440.04,2039.96 ep4c.92
Netll1_1: ll1.1 tps6300.2 | length 260.1
  Top Layer w12: tps6300.2 5227.76,3724.69 ll1.1
Netll1_2: ll1.2 tps6300.4 | length 256.5
  Top Layer w12: tps6300.4 5236.5,3764.06 ll1.2
NetQ1_2: Q1.2 R5.1 | length 356.4
  Bottom Layer w20: R5.1@2585,1685 2585,1349.8 Q1.2
NetQ1_3: Q1.3 RE1.10 | length 177.9
  Bottom Layer w12: Q1.3 2760,1235.83 RE1.10
NetQ2_2: Q2.2 R18.1 | length 195.2
  Bottom Layer w12: R18.1@2340,2995 Q2.2
NetQ2_3: Q2.3 RE2.10 | length 195.5
  Bottom Layer w12: RE2.10@2415,3185 2481.02,3185 Q2.3
NetQ3_2: Q3.2 R37.2 | length 405.5
  Top Layer w12: Q3.2 4557.4,2479.8 R37.2
NetQ3_3: Q3.3 RE3.10 | length 233
  Top Layer w12: v1(4275,2475) 4275,2470 4302.6,2442.4 Q3.3
  Bottom Layer w12: v1(4275,2475) RE3.10
NetQ100_2: Q100.2 R102.2 | length 238.2
  Top Layer w12: Q100.2 4745.2,2150 4770,2150 4869.8,2050.2 R102.2 ; R102.2@4940.2,2045.39 R102.2@4945,2050.2
NetR2_1: R2.1 R3.2 | length 125.2
  Top Layer w10: R3.2 R2.1
NetR6_1: R6.1 U6.3 | length 526
  Top Layer w12: R6.1@2625,1620 2625,2065 2669.37,2109.37 U6.3
NetR6_2: R6.2 RE1.8
NetR7_1: R7.1 U2.7 U.3 | length 321.2
  Top Layer w12: U2.7 3135,1685 3147.6,1672.4 3340.63,1672.4 U.3
NetR7_2: R7.2 U2.5 | length 185.5
  Top Layer w20: U2.5 R7.2@3220,1585
NetR9_1: R9.1 R12.2 U.1 | length 404.8
  Top Layer w12: U.1 3460.43,1717.4 R9.1 ; R9.1@3560,1717.4 R12.2 ; R9.1@3560,1732.4 R9.1 ; R9.1@3565,1717.4 R9.1
NetR9_2: R9.2 R10.2 U.4 | length 336.3
  Top Layer w12: U.4 3386.97,1640 R10.2 ; R10.2@3622.6,1640 R10.2@3647.6,1640
NetR13_2: R13.2 U02.1 | length 200.2
  Top Layer w12: U02.1@1769.8,1209.57 U02.1 R13.2
NetR15_1: R15.1 R16.2 | length 85.2
  Top Layer w12: R16.2 R15.1@2225,3435
NetR19_1: R19.1 U66.3 | length 102.5
  Top Layer w12: R19.1@2895,3255 U66.3@2987.6,3255 ; U66.3@2980,3255 2985,3260 2986.97,3260 U66.3
NetR19_2: R19.2 RE2.8 | length 452.9
  Top Layer w20: v1(2830,3335) 2864.8,3335 R19.2
  Bottom Layer w12: RE2.8 2450,3385 2500,3335 2510,3335 v1(2830,3335)
NetR20_1: R20.1 U17.7 U18.3 | length 288.1
  Top Layer w20: U17.7 3572.4,3255.74 U18.3@3702.6,3255.74
NetR20_2: R20.2 U17.5 | length 181.1
  Top Layer w20: U17.5 3542.4,3155.74 R20.2
NetR22_1: R22.1 R25.2 U18.1 | length 451.1
  Top Layer w12: R22.1@3745,3045 3745,3200 3777.4,3232.4 U18.1 ; R22.1@3750,3035 R25.2@3982.6,3035
NetR22_2: R22.2 R23.2 U18.4 | length 228.7
  Top Layer w12: R23.2@3662.6,2930 R22.2@3662.6,3010.74 ; R22.2 3662.6,3131.37 U18.4
NetR26_2: R26.2 U01.1 | length 112.6
  Top Layer w12: R26.2@1795.2,3235 1800,3239.8 U01.1
NetR29_1: R29.1 U13.12 | length 288.6
  Top Layer w12: U13.12 2390,2395 2485,2300 R29.1
NetR30_1: R30.1 U13.15 | length 278.1
  Top Layer w12: U13.15 2405,2545 2505,2645 R30.1@2535,2645
NetR31_1: R31.1 U13.14 | length 264.3
  Top Layer w12: U13.14 R31.1@2562.6,2495
NetR32_1: R32.1 U13.13 | length 294.4
  Top Layer w12: U13.13 2482.6,2445 2528.9,2398.7 2561.3,2398.7 R32.1@2570,2390
NetR33_1: R33.1 U1.6 U1.7 | length 218.4
  Top Layer w12: U1.6 U1.7 v1(3360,2550)
  Bottom Layer w20: v1(3360,2550) 3370,2560 R33.1
NetR33_2: R33.2 R34.1 U16.6 | length 507.8
  Top Layer w12: v1(3565,2395) 3590,2370 U16.6 3772.6,2370 R34.1@3825,2370
  Bottom Layer w12: R33.2 3505,2560 3565,2500 v1(3565,2395)
NetR35_1: R35.1 U1.8 U1.9 | length 190
  Top Layer w12: U1.8 R35.1@3011.65,2740
NetR35_2: R35.2 R36.1 U16.2 | length 856.9
  Top Layer w12: R35.2 3500,2740 3565,2675 3565,2470 3515,2420 U16.2
NetR36_2: R36.2 U16.1 | length 192.6
  Top Layer w12: U16.1@3475,2470 R36.2@3475,2662.6
NetR38_1: R38.1 U188.47 | length 174.1
  Top Layer w12: R38.1@5035,3045 5105,2975 5105,2901.85 U188.47
NetR39_1: R39.1 U188.14 | length 163.5
  Top Layer w12: R39.1 5106.42,2488.82 U188.14
NetRE3_3: RE3.3 U188.11 | length 574.9
  Top Layer w12: v1(4930,2605) 4930,2610 4971.42,2651.42 U188.11
  Bottom Layer w12: RE3.3 4585,2830 4810,2605 v1(4930,2605)
Netrr1_2: rr1.2 rr2.1 tps6300.10 | length 328.8
  Top Layer w12: rr2.1 4702.6,3540 rr1.2 4862.95,3540.35 tps6300.10
Nettps6300_6: tps6300.6 tps6300.7 tps6300.8
NetU1_13: U1.13 U1.14
NetU2_3: U2.3 U6.1 U6.4 | length 652.5
  Top Layer w12: U6.1@2762.4,2092.4 U6.1 2762.4,2082.4 2750,2070 2705,2070 2687.6,2052.6 U6.4 2687.6,1727.4 2780,1635 U2.3
NetU12_1: U12.1 U13.3 | length 305.4
  Top Layer w12: U12.1 1914.57,2495 U13.3
NetU13_9: U13.9 U14.2 | length 338.7
  Top Layer w12: U13.9 2320,2245 2325,2240 U14.2@2325,1930
NetU13_10: U13.10 U14.1 | length 444.9
  Top Layer w12: U13.10 2350,2295 2380,2265 2380,1928.35 U14.1@2370,1918.35
NetU13_11: U13.11 U14.15 | length 760.9
  Top Layer w12: U13.11 2370,2345 2415,2300 2415,1840 2325,1750 U14.15
NetU17_3: U17.3 U66.1 U66.4 | length 299.2
  Top Layer w12: U66.4 3001.37,3180.63 3062.4,3241.66 U66.1 ; U66.1@3062.4,3250 3090.74,3250 3135,3205.74 U17.3
NSTATUS: ep4c.9 RP1.6 | length 729.8
  Top Layer w12: v1(6320,1885) 6322.52,1882.48 ep4c.9 ; v1(6575,1580) 6577,1582 6663.25,1582 6686,1559.25 RP1.6
  Bottom Layer w12: v1(6320,1885) 6375,1885 6435,1825 6435,1675 6530,1580 v1@6564,1580
RESET: C135.2 ep4c.14 R104.1 S1.2 | length 1088.4
  Top Layer w12: v2(6290,1976.81) 6285.91,1980.91 ep4c.14
  Bottom Layer w12: S1.2@6135,1092.5 6135,1385 ; C135.2@6135,1360 6135,1385 ; v2(6290,1976.81) 6290,1935.3 6135,1780.3 6135,1385
"SPI 595MLE": U14.12
"SPI CLK": U12.5 U14.11 | length 860
  Top Layer w12: U12.5 1790,2240 1825,2205 v1(1825,2190) ; v1(1825,1860) 1885,1800 2085,1800 2125,1760 U14.11
  Bottom Layer w12: v1(1825,1860) v1(1825,2190)
"SPI DA LE": U12.6
"SPI DATA": U12.4 U14.14 | length 965.4
  Top Layer w12: U12.4 1756.14,2033.86 1965,1825 2215,1825 2275,1765 U14.14
TCK: ep4c.16 JTAG1.1 RP2.4 | length 1229.5
  Top Layer w12: ep4c.16 6395.28,2020 6555,2020 6630,1945 v1(6630,1735)
  Bottom Layer w12: v1@6640,1735 6640,1660 6870,1430 6980,1430 7005,1405 7005,1335 JTAG1.1 ; RP2.4 6667,1735 6650,1735 ; 6650,1735 v1(6630,1735) 6650,1735
TDI: ep4c.15 JTAG1.9 RP2.1 | length 1168.7
  Top Layer w12: ep4c.15 6395.59,2000 6500,2000 6590,1910 6590,1660 6637.35,1612.65 6842.35,1612.65 6880,1650.3 v1(6880,1665)
  Bottom Layer w12: RP2.1 6810,1745 6920,1635 7005,1635 JTAG1.9
TDO: ep4c.20 JTAG1.3 | length 1260
  Top Layer w12: ep4c.20 6465,2099.02 ; 6475.98,2099.02 6465,2099.02 ; JTAG1.3 7105,1435 7105,1765 6770.98,2099.02 6465,2099.02
TMS: ep4c.18 JTAG1.5 RP2.2 | length 1177.3
  Top Layer w12: ep4c.18 6395.35,2060 6655,2060 6772.63,1942.37 v1(6772.63,1657.37)
  Bottom Layer w12: RP2.2@6740,1750 6740,1690 6897.5,1532.5 7017.5,1532.5 7055,1495 JTAG1.5
VCC1.2: C106.2 C107.2 C108.2 C109.2 C130.1 C131.2 ep4c.5 ep4c.29 ep4c.37 ep4c.45 ep4c.61 ep4c.78 ep4c.102 ep4c.109 ep4c.116 ep4c.134 LM1117-1.2.2 LM1117-1.2.4 | length 3584.3
  Top Layer w12: ep4c.102 5670,1843.11 ; ep4c.78 5670,2315.55 ; ep4c.109 5633.19,1713.19 5665,1745 5740,1745 5770.98,1714.02 ep4c.116 ; 5670,1745 5670,2315.55 ; ep4c.61 5849.72,2390 ; 6050.55,2727.5 LM1117-1.2.2 ; 6052.5,2727.5 6164.69,2615.31 ep4c.45 6164.69,2385 ; ep4c.134 6125.31,1720.32 6145,1740 6270,1740 6333.74,1803.74 ep4c.5 ; ep4c.37 6322.17,2385 ; ep4c.29 6335.98,2276.18 6322.17,2290 6322.17,2385 ; 5670,2315.55 5805.55,2315.55 5849.72,2359.72 5849.72,2390 ; 5849.72,2390 5854.72,2385 6164.69,2385 ; 6164.69,2385 6322.17,2385
  Top Layer w30: v1(6015,3150) 6015,3122.84 LM1117-1.2.4 LM1117-1.2.2
  Bottom Layer w12: v1(6015,3150) 6020,3145 6039.76,3145 6044.88,3150.12 C131.2@6044.88,2950
VCC2.5: C122.2 C123.2 C132.1 C133.2 ep4c.35 ep4c.107 LM1117-2.5.2 LM1117-2.5.4 | length 1234.1
  Top Layer w12: ep4c.35 6474.29,2394.29 6525,2445 6525,2645 C123.2@6510.2,2659.8
  Top Layer w30: v1(6320,3170) 6320,3152.84 LM1117-2.5.4 LM1117-2.5.2 6385.55,2749.25 C123.2@6514.9,2619.9
  Bottom Layer w12: v1(6320,3170) C132.1 6359.88,3139.88 C133.2@6359.88,2965
VREF: C33.2 C73.2 R27.1 R28.1 U2.2 U17.2 | length 322.3
  Top Layer w12: C73.2@1469.8,2215 1474.8,2220 R27.1@1474.8,2440 ; C33.2 R28.1@1570,2320
pads on no net: ep4c.23 ep4c.25 ep4c.38 ep4c.39 ep4c.42 ep4c.43 ep4c.44 ep4c.46 ep4c.49 ep4c.50 ep4c.51 ep4c.64 ep4c.73 ep4c.74 ep4c.80 ep4c.88 ep4c.89 ep4c.90 ep4c.91 ep4c.110 ep4c.111 ep4c.112 ep4c.113 ep4c.114 ep4c.115 ep4c.119 ep4c.120 ep4c.121 ep4c.124 ep4c.125 ep4c.126 ep4c.127 ep4c.128 ep4c.129 ep4c.132 ep4c.133 ep4c.135 ep4c.136 ep4c.137 ep4c.138 ep4c.141 ep4c.142 ep4c.143 ep4c.144 JTAG1.6 JTAG1.7 JTAG1.8 RE1.2 RE1.3 RE1.4 RE1.5 RE1.6 RE2.2 RE2.3 RE2.4 RE2.5 RE2.6 RE3.5 RE3.6 RE3.9 RP1.4 RP1.5 tps6300.11 tps6300.12 tps6300.13 tps6300.14 tps6300.15 tps6300.16 tps6300.17 tps6300.18 U13.1 U13.2 U13.4 U13.5 U14.9 U188.25 U188.26 U188.35 U188.36 Y1.1

## Keep-outs
Keep-Out Layer:
  lines w10: 1190,285 1190,3503.79 1190,4105 7325,4105 7325,285 1190,285

## Text inside footprints (layer, text, board x,y; h text height)
J1: Mechanical 1 "Alert PCB fab to slot details" at 7288.74,3581.18 h11.81 r180; Mechanical 1 "Assign keep-out area to slot" at 7288.74,3561.5 h11.81 r180; Mechanical 1 "Mech 1 - Slot cut-out" at 7288.74,3600.87 h11.81 r180; Mechanical 1 "Mech 2 - Clearance, move to internal plane if present" at 7288.74,3620.56 h11.81 r180
JTAG1: Top Overlay "10" at 6975,1745 h40 r90; Top Overlay "9" at 7075,1745 h40 r90; Top Overlay "1" at 7075,1205 h40 r90; Top Overlay "2" at 6975,1185 h40 r90